# Allegro board uart-sniffer.brd
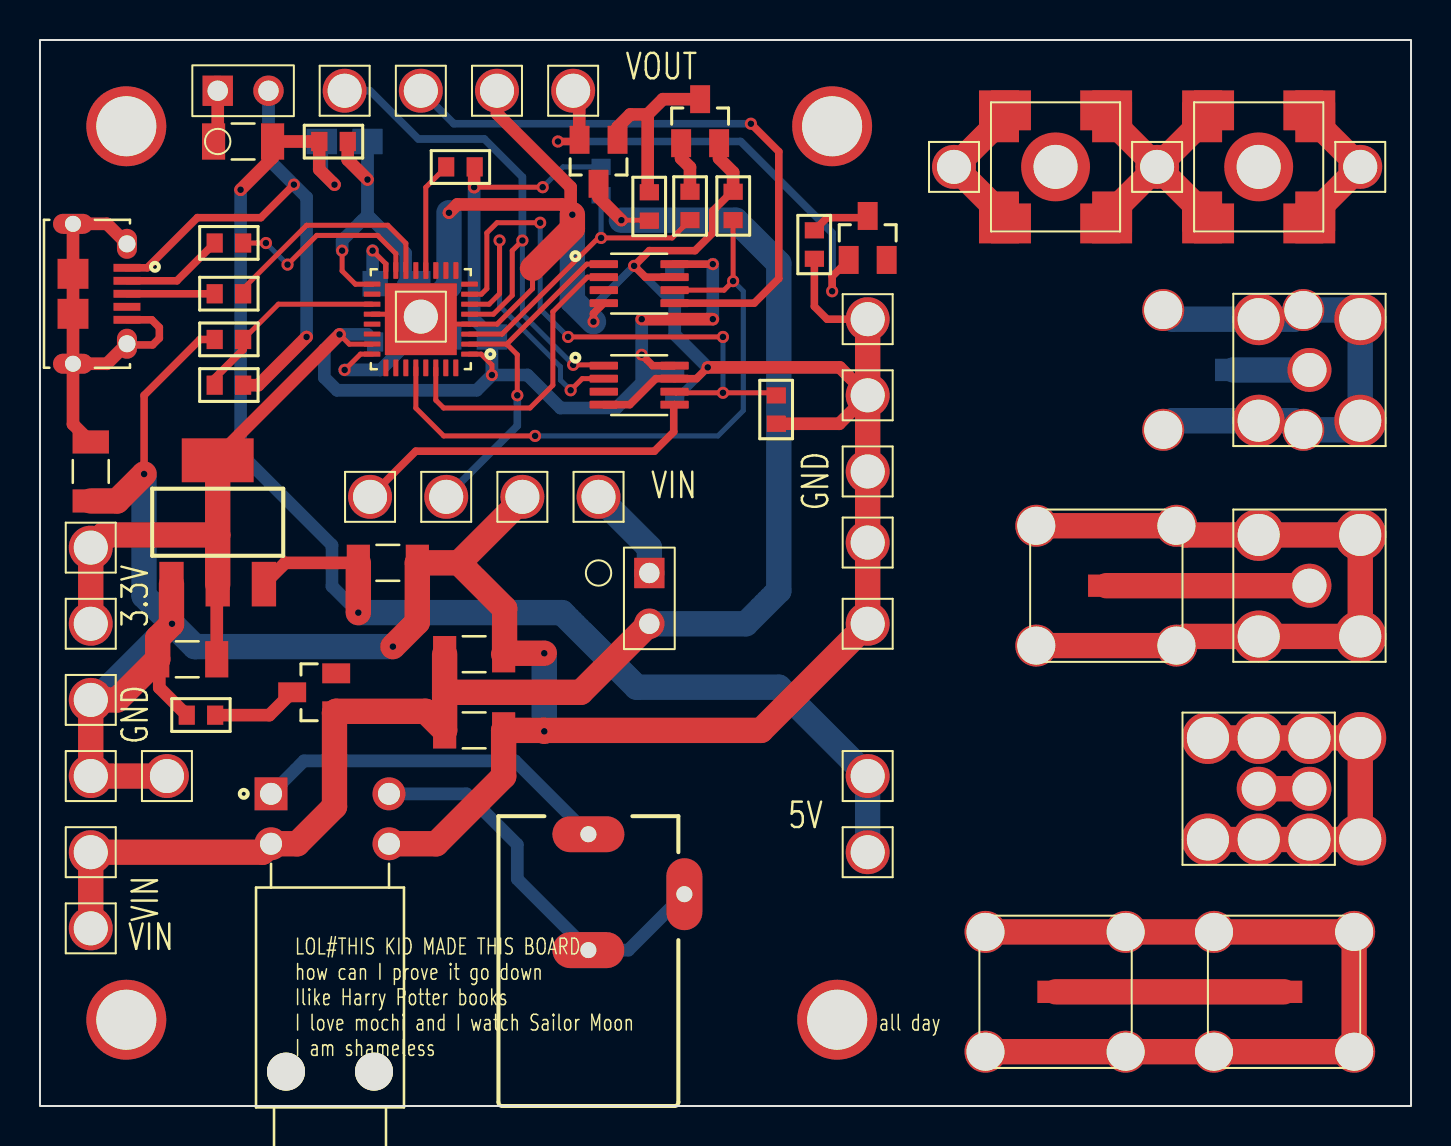
[diagram p0: board, top side]
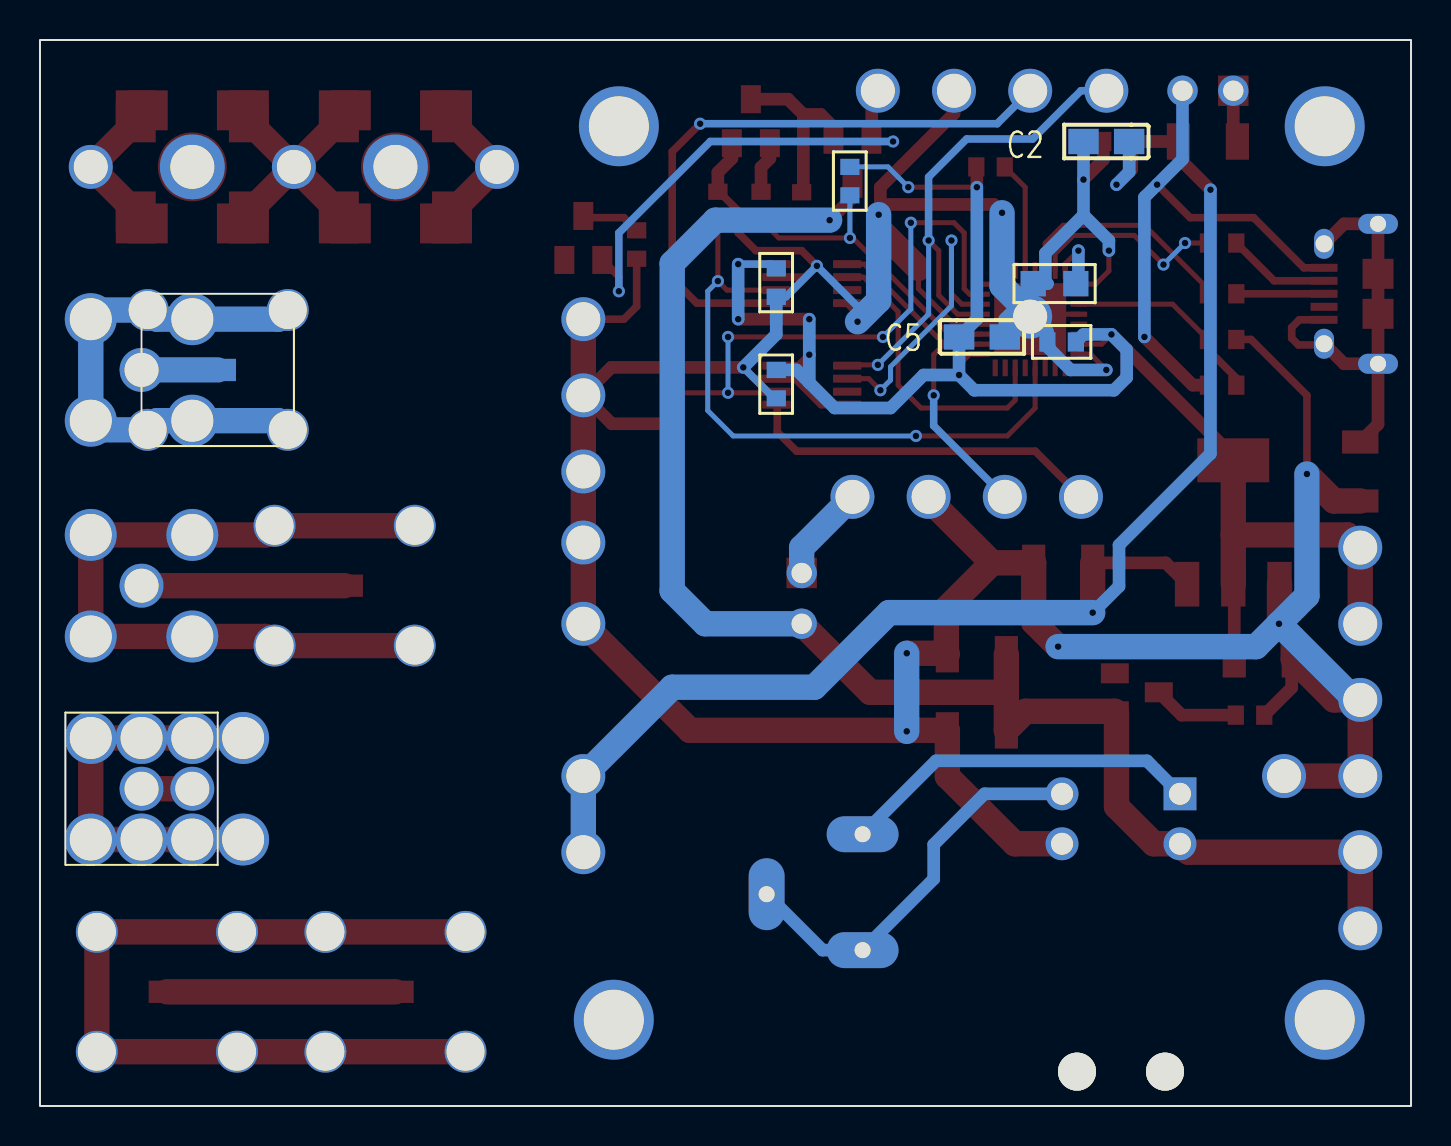
[diagram p1: board, bottom side, seen from below]

Outline 68.58 x 53.34 mm; copper layers: TOP, BOTTOM. Coordinates in mm from the lower left corner of the outline.
Outline path: rectangle 0,0 68.58,53.34

## Design rules (mm)
constraint set DEFAULT: min track width 0.254

## Placement (name value [footprint] x y rotation side)
C1  100nF  [0603]  13.97 48.26 0 top
C2  10uF  [C0805]  15.24 48.26 0 bottom
C3  1uF  [0805]  16.76 41.15 0 bottom
C4  100nF  [0603]  16.76 38.23 0 bottom
C5  10uF  [C0805]  21.46 38.48 180 bottom
C6  100nF  [0603]  31.75 36.83 270 bottom
C7  47uF  [1206]  21.72 22.61 0 top
C8  47uF  [1206]  21.72 18.8 0 top
C9  100nF  [0603]  31.75 41.91 270 bottom
C10  47uF  [1206]  17.4 27.18 0 top
C11  47uF  [1206]  7.37 22.35 180 top
D1  LED SOT23  [SOT23]  13.72 20.7 90 top
D2  LED SOT23  [SOT23]  41.4 43.43 0 top
D3  -  [LZ1-00R602]  50.8 46.99 0 top
D4  -  [LZ1-00R602]  60.96 46.99 0 top
FB1  MPZ2012S102AT  [1206]  10.16 48.26 0 top
J1  HEADER-2  [HDR2-100]  8.89 50.8 90 top
J2  HEADER-2  [HDR2-100]  30.48 26.67 0 top
J3  DC_POWER_JACK  [BARREL-JACK]  27.43 0 90 top
L1  ferrite bead  [1206]  2.54 31.75 270 top
MH1  CK#  [PI-HOLE]  4.32 49.02 0 top
MH2  CK#  [PI-HOLE]  39.62 49.02 0 top
MH3  CK#  [PI-HOLE]  39.88 4.32 0 top
MH4  CK#  [PI-HOLE]  4.32 4.32 0 top
P1  USB-10118194  [USB_10118194]  1.65 40.64 270 top
P2  -  [FAKRA-RF55-23Z]  62.23 5.72 180 top
P3  -  [FAKRA-WM25509]  63.5 15.88 180 bottom
P4  -  [FAKRA-RF55-23Z]  50.8 5.72 0 top
P5  -  [FAKRA-WM25509]  60.96 15.88 0 top
P6  -  [FAKRA-RF55-23Z]  59.69 36.83 180 bottom
P7  -  [FAKRA-WM25509]  63.5 36.83 180 top
P8  -  [FAKRA-RF55-23Z]  53.34 26.03 0 top
P9  -  [FAKRA-WM25509]  63.5 26.03 180 top
Q1  NPN  [SOT23]  33.02 49.28 0 top
Q2  PNP  [SOT23]  27.94 47.24 180 top
R1  27R  [0603]  10.16 40.64 180 top
R2  470R  [0603]  32.51 44.32 90 top
R3  27R  [0603]  10.16 43.18 180 top
R4  470R  [0603]  30.48 45.72 270 top
R5  1KR  [0603]  8.76 19.56 180 top
R6  100KR  [0603]  20.32 46.99 0 top
R7  10KR  [0603]  34.67 44.32 90 top
R8  10KR  [0603]  36.83 35.56 270 top
R9  10KR  [0603]  10.16 38.35 180 top
R10  4.7KR  [0603]  10.16 36.07 180 top
R11  1KR  [0603]  38.74 43.81 270 top
R12  470R  [0603]  28.07 46.99 270 bottom
S1  -  [PB400EEQX]  11.56 15.62 0 top
TP1  CK#  [TESTPOINT]  15.24 50.8 0 top
TP2  CK#  [TESTPOINT]  16.51 30.48 0 top
TP3  CK#  [TESTPOINT]  19.05 50.8 0 top
TP4  CK#  [TESTPOINT]  20.32 30.48 0 top
TP5  CK#  [TESTPOINT]  22.86 50.8 0 top
TP6  CK#  [TESTPOINT]  24.13 30.48 0 top
TP7  CK#  [TESTPOINT]  26.67 50.8 0 top
TP8  CK#  [TESTPOINT]  27.94 30.48 0 top
TP9  CK#  [TESTPOINT]  2.54 12.7 0 top
TP10  CK#  [TESTPOINT]  2.54 8.89 0 top
TP11  CK#  [TESTPOINT]  41.4 39.37 0 top
TP12  CK#  [TESTPOINT]  41.4 35.56 0 top
TP13  CK#  [TESTPOINT]  41.4 31.75 0 top
TP14  CK#  [TESTPOINT]  2.54 20.32 0 top
TP15  CK#  [TESTPOINT]  41.4 24.13 0 top
TP16  CK#  [TESTPOINT]  2.54 27.94 0 top
TP17  CK#  [TESTPOINT]  2.54 24.13 0 top
TP18  CK#  [TESTPOINT]  6.35 16.51 0 top
TP19  CK#  [TESTPOINT]  2.54 16.51 0 top
TP20  CK#  [TESTPOINT]  19.05 39.5 0 top
TP21  CK#  [TESTPOINT]  41.4 28.19 0 top
TP22  CK#  [TESTPOINT]  41.4 16.51 0 top
TP23  CK#  [TESTPOINT]  41.4 12.7 0 top
TP24  CK#  [TESTPOINT]  45.72 46.99 0 top
TP25  CK#  [TESTPOINT]  55.88 46.99 0 top
TP26  CK#  [TESTPOINT]  66.04 46.99 0 top
U1  CY7C65215  [QFN33]  19.05 39.37 180 top
U2  SN74LVC2G157  [SSOP8]  29.97 41.15 0 top
U3  SN74LVC2G157  [SSOP8]  29.97 36.07 0 top
U4  ZLDO1117QG33TA  [SOT223]  8.89 29.21 0 top

## Library data of the parts
C1-C5 = CAP NPOL
C6-C11 = MLCC
D1 D2 = DIODE LED SOT23
D3 D4 = LZ1-00R602
FB1 = F-BEAD
J1 J2 = JUMPER2
J3 = DC_POWER_JACK
L1 = INDUCTOR
MH1-MH4 TP1-TP26 = TP
P1 = USB-10118194
P2 P4 P6 P8 = FAKRA-RF55-23Z
P3 P5 P7 P9 = FAKRA-WM25509
Q1 Q2 = NPN
R1-R5 R11 R12 = RES
R6-R10 = R_5
S1 = PB400EEQX
U1 = CY7C65215
U2 U3 = SN74LVC2G157
U4 = ZLDO1117

## Footprints (pads in the part's own frame, mm; a bottom-side part is the same pattern mirrored in y, then rotated)
0603
  rect 0.813x0.965 smd: 1(0,0) 2(1.422,0)
0805
  rect 1.27x1.27 smd: 1(0,0) 2(2.134,0)
1206
  rect 1.161x1.821 smd: 1(-1.476,0) 2(1.476,0)
BARREL-JACK
  oval 1.801x3.599 hole 0.8: 1(13.599,0) 2(7.8,0)
  oval 3.599x1.801 hole 0.8: 3(10.599,-4.801)
C0805
  rect 1.524x1.27 smd: 1(-1.143,0) 2(1.143,0)
FAKRA-RF55-23Z
  rect 1.829x1.118 smd: 1(0,0)
  round 2.101 hole 1.9: 2(-3.505,-2.997) 3(3.505,-2.997) 4(3.505,2.997) 5(-3.505,2.997)
FAKRA-WM25509
  round 2.2 hole 1.699: 1(0,0)
  round 2.601 hole 2.101: 2(-2.54,-2.54) 3(2.54,-2.54) 4(2.54,2.54) 5(-2.54,2.54)
HDR2-100
  rect 1.524x1.524 hole 1.016: 1(0,0)
  round 1.524 hole 1.016: 2(0,-2.54)
LZ1-00R602
  rect 1.999x1.999 smd: 1(-2.23,2.83) 2(-2.23,-2.83) 3(2.23,-2.83) 4(2.23,2.83) 5(-2.83,2.23) 6(-2.83,-2.23) 7(2.83,-2.23) 8(2.83,2.23) 10(-2.83,2.83) 11(-2.83,-2.83) 12(2.83,-2.83) 13(2.83,2.83)
  round 3.251 hole 2.2: 9(0,0)
  round 3.449 smd: 14(0,0)
PB400EEQX
  round 1.9 hole 1.9 unplated: (0.749,-13.899) (5.151,-13.899)
  rect 1.651x1.651 hole 1.1: 1(0,0)
  round 1.651 hole 1.1: 2(0,-2.499) 3(5.9,0) 4(5.9,-2.499)
PI-HOLE
  round 4 hole 3: 1(0,0)
QFN33
  custom 0.838x0.259 smd: 1(-2.436,1.75) 2(-2.436,1.25) 3(-2.436,0.749) 4(-2.436,0.249) 5(-2.436,-0.249) 6(-2.436,-0.749) 7(-2.436,-1.25) 8(-2.436,-1.75) 17(2.436,-1.75) 18(2.436,-1.25) 19(2.436,-0.749) 20(2.436,-0.249) 21(2.436,0.249) 22(2.436,0.749) 23(2.436,1.25) 24(2.436,1.75)
  custom 0.259x0.838 smd: 9(-1.75,-2.436) 10(-1.25,-2.436) 11(-0.749,-2.436) 12(-0.249,-2.436) 13(0.249,-2.436) 14(0.749,-2.436) 15(1.25,-2.436) 16(1.75,-2.436) 25(1.75,2.436) 26(1.25,2.436) 27(0.749,2.436) 28(0.249,2.436) 29(-0.249,2.436) 30(-0.749,2.436) 31(-1.25,2.436) 32(-1.75,2.436)
  rect 3.599x3.599 smd: 33(0,0)
SOT23
  rect 1.001x1.4 smd: 1(-0.95,-1.1) 2(0.95,-1.1) 3(0,1.1)
SOT223
  rect 1.219x2.235 smd: 1(-2.311,-3.099) 2(0,-3.099) 3(2.311,-3.099)
  rect 3.599x2.2 smd: 4(0,3.099)
SSOP8
  custom 1.422x0.401 smd: 1(-1.77,0.975) 2(-1.77,0.325) 3(-1.77,-0.325) 4(-1.77,-0.975) 5(1.77,-0.975) 6(1.77,-0.325) 7(1.77,0.325) 8(1.77,0.975)
TESTPOINT
  round 2.2 hole 1.699: 1(0,0)
USB_10118194
  rect 0.399x1.349 smd: 1(-1.3,2.7) 2(-0.65,2.7) 3(0,2.7) 4(0.65,2.7) 5(1.3,2.7)
  oval 1.501x1.001 hole 0.851: S1(-2.499,2.7) S2(2.499,2.7)
  oval 1.001x1.999 hole 0.8: S3(-3.5,0) S6(3.5,0)
  rect 1.501x1.549 smd: S4(-1.001,0) S5(1.001,0)

## Nets
GND: C1.2 C2.2 C3.2 C4.2 C5.2 C6.2 C7.2 C8.2 C9.2 C10.2 C11.2 L1.2 Q1.2(E) R5.2 R7.2 R8.2 R9.2 R11.2 S1.4 TP5.1 TP6.1 TP11.1 TP12.1 TP13.1 TP14.1 TP15.1 TP18.1 TP19.1 TP20.1 TP21.1 U1.4 U1.17 U1.20 U1.24 U1.33 U2.4 U2.7 U3.4 U3.7 U4.1
VDD33: C4.1 C5.1 C6.1 C9.1 C11.1 R6.2 R12.1 TP16.1 TP17.1 U1.1 U1.23 U2.8 U3.8 U4.2(OUT) U4.4
EXT-VDD12: J3.1 S1.1
PWRON: R2.1 R12.2 U1.3
RX1: TP1.1 U1.5 U3.1
RX2: TP4.1 U1.2 U2.1
SHIELD1: P2.2 P2.3 P2.4 P2.5 P4.2 P4.3 P4.4 P4.5
SHIELD2: P3.2 P3.3 P3.4 P3.5 P5.2 P5.3 P5.4 P5.5
SHIELD3: P6.2 P6.3 P6.4 P6.5 P7.2 P7.3 P7.4 P7.5
SHIELD4: P8.2 P8.3 P8.4 P8.5 P9.2 P9.3 P9.4 P9.5
SIGNAL1: P2.1(SIGNAL) P4.1(SIGNAL)
SIGNAL2: P3.1(SIGNAL) P5.1(SIGNAL)
SIGNAL3: P6.1(SIGNAL) P7.1(SIGNAL)
SIGNAL4: P8.1(SIGNAL) P9.1(SIGNAL)
SYS-VDD5: C1.1 C2.1 C10.1 FB1.2 TP22.1 TP23.1 U4.3
SYS-VDD12: C7.1 C8.1 D1.1 J2.2 Q2.3 R4.2 S1.2 TP9.1 TP10.1
TX1: TP3.1 U2.5(Y)
TX2: TP2.1 U3.5(Y)
USB-5V: J1.2 P1.1 R10.1
N01185: FB1.1 J1.1
N01265: L1.1 P1.5 P1.S1 P1.S2 P1.S3 P1.S4 P1.S5 P1.S6
N01297: P1.2 R3.2
N01351: P1.3 R1.2
N01863: R1.1 U1.14
N01875: R3.1 U1.15
N01969: R6.1 U1.12(WAKEUP)
N03507: U1.30 U2.2
N03545: U1.6 U3.2
N03945: R7.1 U1.28 U2.6
N03957: R8.1 U1.7 U3.6
N06682: D1.3 R5.1
N06742: J3.2 J3.3 S1.3
N08040: J2.1 TP8.1
N15165814: Q1.3 Q2.1 R4.1
N15166033: D2.1 Q2.2(E) TP7.1
N15166401: Q1.1 R2.2
N15180660: R9.1 R10.2 U1.19
N15181027: C3.1 U1.16
N15181785: D2.3 R11.1
N15184954: D3.1 D3.2 D3.5 D3.6 D3.10 D3.11 TP24.1
N15185058: D3.3 D3.4 D3.7 D3.8 D3.12 D3.13 D4.1 D4.2 D4.5 D4.6 D4.10 D4.11 TP25.1
N15185611: D4.3 D4.4 D4.7 D4.8 D4.12 D4.13 TP26.1

Pads without a net: D1 2; D2 2; D3 9 14; D4 9 14; MH1 1; MH2 1; MH3 1; MH4 1; P1 4; U1 8 9 10 11 13 18 21 22 25 26 27 29 31 32; U2 3; U3 3

## Via types
v1: diameter 0.61, hole 0.33, TOP to BOTTOM, 45 vias

## Routing (per net, layer and track width the routed paths; a pad name or vN(x,y) marks a point on that pad's centre or on a via; arc(x,y) is an arc through that point)
GND: length 242.6
  TOP w0.254: U1.24 16.03,37.62 v1(15.24,36.83) ; 24.64,41.91 24.64,40.89 22.87,39.12 U1.4 19.3,39.12 U1.33 18.8,39.62 U1.20 ; 26.54,44.51 v1(26.63,44.6) ; v1(15.11,42.8) 15.11,41.78 15.78,41.12 U1.17
  TOP w0.381: TP11.1 39.37,39.37 38.74,40 R11.2 ; R7.2 34.61,45.75 33.66,44.79 33.66,43.69 32.77,42.8 30.48,42.8 v1(29.72,42.04) 30.28,41.47 U2.7 ; v1(5.21,31.62) 5.21,35.56 8,38.35 R9.2 ; v1(33.4,36.96) 32.84,36.39 U3.7 30.81,36.39 29.5,35.09 U3.4 ; U2.4 27.69,39.66 v1(27.69,39.24)
  TOP w0.635: 26.54,44.68 v1(26.63,44.6) ; 26.54,44.68 26.54,45.97 22.86,49.66 TP5.1 ; 26.54,44.68 26.12,45.11 20.87,45.11 v1(20.46,44.69) ; R7.2 34.67,46.71 33.97,47.41 Q1.2 ; C11.2 5.97,22.27 5.97,20.93 R5.2 ; R8.2 39.98,34.14 TP12.1 40,36.96 v1(33.4,36.96) ; C1.2 15.39,47.35 v1(16.38,46.36)
  TOP w1.27: C7.2 23.24,22.65 ; 23.24,22.65 23.24,24.89 20.95,27.18 ; 23.24,22.65 v1(25.22,22.65) ; 25.18,18.8 36.07,18.8 TP15.1 TP21.1 TP13.1 TP12.1 TP11.1 ; 25.18,18.8 v1(25.22,18.75) ; 25.18,18.8 C8.2 23.19,16.5 19.82,13.12 S1.4 ; U4.1 6.58,24.11 5.89,23.42 C11.2 3.86,20.32 TP14.1 TP19.1 TP18.1 ; 20.95,27.18 24.13,30.35 TP6.1 ; 20.95,27.18 C10.2 18.87,24.21 v1(17.65,22.99) ; v1(5.21,31.62) 3.86,30.27 L1.2 ; 24.64,41.91 26.63,43.9 v1(26.63,44.6)
  BOTTOM w0.381: C6.2 31.85,35.41 v1(33.4,36.96) ; C3.2 18.9,39.65 TP20.1 ; v1(27.69,39.24) 27.69,40 v1(29.72,42.04) 31.27,40.49 C9.2
  BOTTOM w0.635: 16.38,44.58 18.29,42.67 18.29,41.25 18.19,41.15 18.54,41.15 19.56,40.13 ; 16.38,44.58 15.11,43.31 v1(15.11,42.8) ; 16.38,44.58 v1(16.38,46.36) C2.2 ; 19.56,40.13 20.32,39.37 C5.2 ; 19.56,40.13 18.19,38.76 C4.2 18.19,37.99 17.03,36.83 v1(15.24,36.83) ; C9.2 31.75,38.61 v1(33.4,36.96)
  BOTTOM w1.27: 19.56,40.13 20.46,41.03 v1(20.46,44.69) ; TP14.1 2.79,20.32 v1(6.6,24.13) ; v1(17.65,22.99) 7.75,22.99 v1(6.6,24.13) ; v1(5.21,31.62) 5.21,25.53 v1(6.6,24.13) ; v1(26.63,44.6) 26.63,40.3 v1(27.69,39.24) ; v1(25.22,22.65) v1(25.22,18.75)
VDD33: length 89.7
  TOP w0.254: U1.1 22.07,37.62 22.61,37.08 v1(22.61,36.58) ; v1(14.99,38.61) 15.47,38.12 U1.23 ; v1(25.15,45.97) v1(21.72,45.97)
  TOP w0.381: U2.8 v1(33.66,42.12) ; v1(30.1,37.59) 30.65,37.04 U3.8
  TOP w0.635: v1(30.1,39.37) v1(33.66,39.37) ; U4.2 8.84,26.06 C11.1 ; R6.2 21.72,46.96 v1(21.72,45.97) ; v1(14.99,38.61) 8.89,32.51 U4.4
  TOP w1.27: U4.2 8.89,28.58 ; 8.89,28.58 U4.4 ; 8.89,28.58 3.17,28.58 TP16.1 TP17.1
  BOTTOM w0.254: v1(25.15,45.97) 26.16,46.99 R12.1
  BOTTOM w0.381: v1(33.66,42.12) 31.96,42.12 C9.1
  BOTTOM w0.635: v1(30.1,39.37) v1(30.1,37.59) 30.1,36.19 ; C4.1 16.38,38.61 v1(14.99,38.61) 14.22,37.85 14.22,36.45 14.86,35.81 21.84,35.81 v1(22.61,36.58) ; v1(21.72,45.97) 21.72,39.37 C5.1 v1(22.61,36.58) ; 30.1,36.19 30.73,36.83 C6.1 ; 30.1,36.19 28.83,34.92 26.03,34.92 24.38,36.58 v1(22.61,36.58) ; v1(33.66,39.37) v1(33.66,42.12)
EXT-VDD12: length 18.1
  BOTTOM w0.635: S1.1 13.21,17.27 23.76,17.27 J3.1
PWRON: length 15.5
  TOP w0.254: U1.3 23.11,38.62 27.92,43.43 v1(28.07,43.43) 31.62,43.43 R2.1
  BOTTOM w0.254: R12.2 v1(28.07,43.43)
RX1: length 28.2
  TOP w0.254: U1.5 22.68,39.62 23.62,40.56 23.62,42.8 v1(24.13,43.31) ; v1(26.67,37.08) 28.16,37.08 U3.1
  BOTTOM w0.254: v1(26.67,37.08) 24.13,39.62 v1(24.13,43.31)
  BOTTOM w0.381: TP1.1 16.51,50.8 18.92,48.39 22.23,48.39 24.13,46.48 v1(24.13,43.31)
RX2: length 17.7
  TOP w0.254: v1(23.88,35.56) 23.88,37.59 23.35,38.12 ; 23.35,38.12 U1.2 ; 23.35,38.12 27.35,42.12 U2.1
  BOTTOM w0.381: TP4.1 23.88,34.04 v1(23.88,35.56)
SHIELD1: length 42.9
  TOP w1.27: P4.5 P4.4 P2.3 P2.2 P2.5 P2.4 P4.3 P4.2
SHIELD2: length 20.3
  TOP w1.27: P5.5 P3.4 P5.4 P3.5 P3.2 P5.3 P3.3 P5.2
SHIELD3: length 25.9
  BOTTOM w1.27: P6.4 56.64,39.37 P7.3 62.74,39.37 P6.5 65.58,39.83 P7.2 P7.5 65.58,33.83 P6.2 62.74,34.29 P7.4 56.64,34.29 P6.3
SHIELD4: length 37.9
  TOP w1.27: P8.2 P8.3 57.3,23.5 66.04,23.5 P9.2 P9.3 57.3,28.58 P8.4 P8.5
SIGNAL1: length 11.4
  TOP w1.27: P4.1 P2.1
SIGNAL2: length 2.5
  TOP w1.27: P5.1 P3.1
SIGNAL3: length 3.8
  BOTTOM w1.27: P6.1 P7.1
SIGNAL4: length 10.2
  TOP w1.27: P8.1 P9.1
SYS-VDD5: length 74.2
  TOP w0.635: v1(10.03,45.85) 11.64,47.45 FB1.2 C1.1 13.97,46.86 v1(14.73,46.1) ; U4.3 12.27,27.18 C10.1
  TOP w1.27: C10.1 v1(15.92,24.69)
  BOTTOM w0.635: C2.1 14.1,46.74 v1(14.73,46.1) ; v1(15.92,24.69) 14.61,26 14.61,28.07 10.03,32.64 v1(10.03,45.85)
  BOTTOM w1.27: v1(15.92,24.69) 26.11,24.69 29.84,20.95 36.96,20.95 TP22.1 TP23.1
SYS-VDD12: length 79.1
  TOP w0.254: R4.2 30.45,44.32 v1(29.08,44.32)
  TOP w0.635: Q2.3 27.94,45.47 v1(29.08,44.32)
  TOP w1.27: TP10.1 TP9.1 11.14,12.7 S1.2 12.87,13.12 14.73,14.99 14.73,19.67 D1.1 19.29,19.75 C8.1 20.24,20.7 ; 20.24,20.7 27.05,20.7 J2.2 ; 20.24,20.7 C7.1
  BOTTOM w1.27: v1(29.08,44.32) 34.8,44.32 36.96,42.16 36.96,25.78 35.31,24.13 J2.2
TX1: length 31.2
  TOP w0.381: v1(35.56,49.15) 36.96,47.75 36.96,41.4 35.73,40.17 U2.5
  BOTTOM w0.381: v1(35.56,49.15) 20.7,49.15 TP3.1
TX2: length 17.9
  TOP w0.381: U3.5 31.7,35.05 31.7,33.73 30.73,32.77 18.8,32.77 TP2.1
USB-5V: length 27.4
  TOP w0.381: P1.1 5.36,41.94 7.87,44.45 11.05,44.45 v1(12.7,46.1)
  TOP w0.635: v1(13.34,38.48) 10.92,36.07 R10.1
  BOTTOM w0.635: v1(13.34,38.48) 13.34,45.47 v1(12.7,46.1) 11.43,47.37 J1.2
N01185: length 2.6
  TOP w0.635: FB1.1 8.89,48.47 J1.1
N01265: length 21.6
  TOP w0.381: P1.S2 4.41,38.08 5.63,38.08 5.97,38.42 5.97,38.96 5.59,39.34 P1.5
  TOP w0.635: P1.S2 3.35,37.14 P1.S6 ; P1.S1 3.35,44.14 P1.S3 P1.S4 P1.S5 P1.S6 ; P1.S6 1.65,34.11 L1.1
N01297: length 5.2
  TOP w0.381: P1.2 6.85,41.29 R3.2
N01351: length 4.4
  TOP w0.381: P1.3 R1.2
N01863: length 11.4
  TOP w0.254: U1.14 18.3,43.17 17.4,44.07 13.34,44.07 10.16,40.89 R1.1
N01875: length 9.9
  TOP w0.254: v1(12.38,42.1) 13.84,43.56 16.89,43.56 17.8,42.65 U1.15 ; v1(11.3,43.18) R3.1
  BOTTOM w0.254: v1(12.38,42.1) v1(11.3,43.18)
N01969: length 5.6
  TOP w0.254: R6.1 19.3,45.97 U1.12
N03507: length 15
  TOP w0.254: U1.30 19.8,35.32 20.19,34.92 24.51,34.92 25.65,36.07 25.65,39.74 27.38,41.47 U2.2
N03545: length 15.2
  TOP w0.254: U1.6 22.47,40.12 22.99,40.64 v1(22.99,43.31) ; v1(26.54,35.81) 27.12,36.39 U3.2
  BOTTOM w0.254: v1(26.54,35.81) 26.03,36.32 26.03,36.99 22.99,40.04 v1(22.99,43.31)
N03945: length 32.3
  TOP w0.254: U1.28 18.8,34.92 20.19,33.53 v1(24.77,33.53) ; U2.6 34.22,40.82 v1(34.67,41.28) R7.1
  BOTTOM w0.254: v1(34.67,41.28) 35.18,40.77 35.18,34.8 33.91,33.53 v1(24.77,33.53)
N03957: length 28.6
  TOP w0.254: U1.7 22.08,40.62 22.35,40.89 22.35,43.69 22.86,44.2 v1(25.02,44.2) ; U3.6 31.8,35.69 v1(34.16,35.69) 36.7,35.69 R8.1 ; v1(26.42,38.48) v1(34.16,38.48)
  BOTTOM w0.254: v1(25.02,44.2) 25.02,39.88 v1(26.42,38.48) ; v1(34.16,38.48) v1(34.16,35.69)
N06682: length 4.3
  TOP w0.635: D1.3 11.47,19.56 R5.1
N06742: length 20.2
  BOTTOM w0.635: J3.3 29.43,7.8 J3.2 23.88,11.36 23.88,13.08 21.34,15.62 S1.3
N08040: length 4.9
  BOTTOM w1.27: TP8.1 30.48,27.94 J2.1
N15165814: length 9.3
  TOP w0.635: 30.4,49.61 29.52,49.61 28.89,48.98 Q2.1 ; 30.4,49.61 30.4,45.8 R4.1 ; 30.4,49.61 31.16,50.38 Q1.3
N15166033: length 24.1
  TOP w0.381: Q2.2 26.91,48.26 v1(25.91,48.26) ; D2.1 39.62,41.51 v1(39.62,40.77)
  TOP w0.635: TP7.1 26.97,50.5 26.97,48.36 Q2.2
  BOTTOM w0.381: v1(39.62,40.77) 39.62,43.69 35.05,48.26 v1(25.91,48.26)
N15166401: length 2.6
  TOP w0.635: Q1.1 32.07,47.41 32.51,46.97 R2.2
N15180660: length 10.1
  TOP w0.254: R9.1 11.93,40.12 U1.19
  TOP w0.381: R10.2 8.74,36.42 10.16,37.85 R9.1
N15181027: length 3
  TOP w0.254: v1(16.64,42.8) 17.3,42.14 U1.16
  BOTTOM w0.635: C3.1 16.64,41.28 v1(16.64,42.8)
N15181785: length 3
  TOP w0.381: D2.3 41.32,44.45 39.37,44.45 R11.1
N15184954: length 6.3
  TOP w1.27: 45.74,46.99 D3.6 ; 45.74,46.99 TP24.1 ; 45.74,46.99 D3.5
N15185058: length 15.1
  TOP w1.27: TP25.1 53.63,44.74 D3.12 ; TP25.1 58.13,49.24 D4.10 ; TP25.1 58.13,44.74 D4.11 ; TP25.1 53.63,49.24 ; D3.13 53.63,49.24 ; 53.63,49.24 D3.8
N15185611: length 7.5
  TOP w1.27: D4.12 63.79,44.74 TP26.1 63.79,49.24 D4.13

## Text on the board
Ref Des/Silkscreen Top: LOL#THIS KID MADE THIS BOARD | how can I prove it go down | Ilike Harry Potter books | I love mochi and I watch Sailor Moon | I am shameless | all day | VIN | VOUT | 5V | 3.3V | GND
